# EAGLE board LampBoxV0.31-THT (EAGLE 9.6.2)
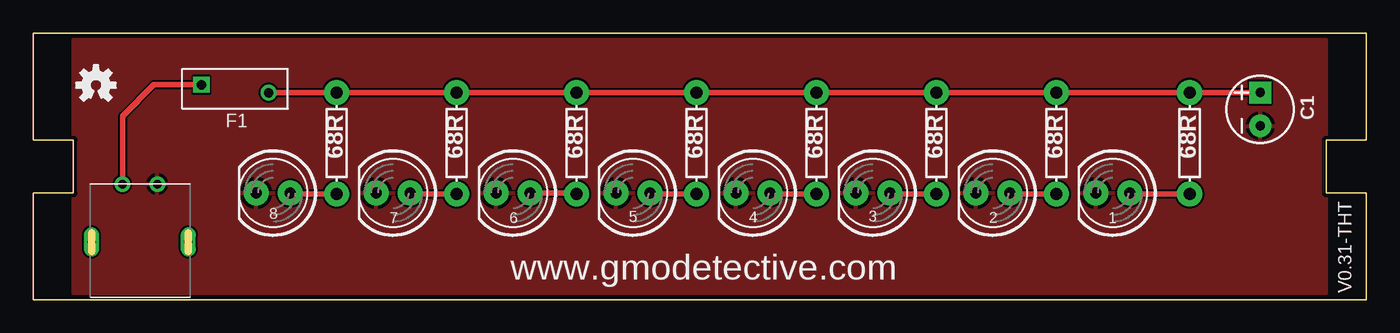
[diagram p0: board, top side]
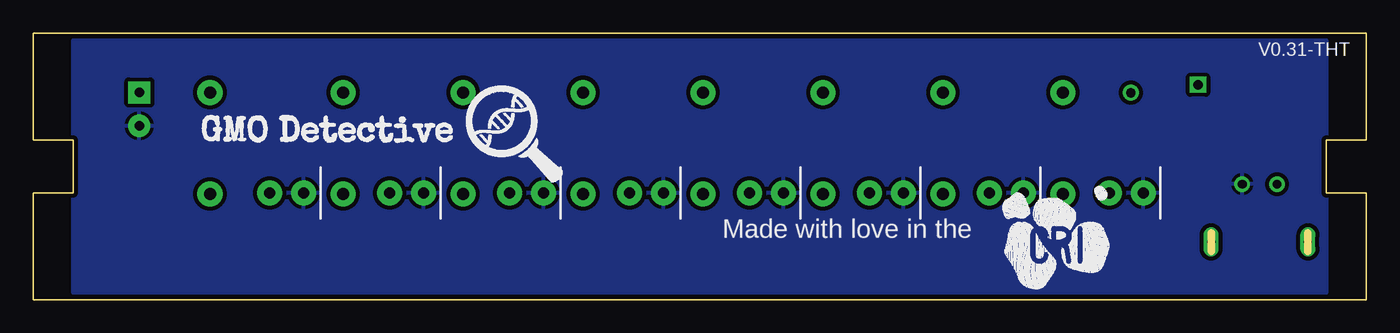
[diagram p1: board, bottom side, seen from below]

Size 100 x 20 mm. Coordinates in mm from the lower left corner, seen from the top.
Outline: 100,0 0,0 0,8 3,8 3,12 0,12 0,20 100,20 100,12 97,12 97,8 100,8 100,0
Copper layers (1*16): Top 0.035mm / dielectric 1.5mm / Bottom 0.035mm
Design rules "PCBWAY_2layer_DRU_no_angle_cheap": minimum track width 0.2mm, minimum drill 0.3mm, track to track 6mil, track to pad 6mil, pad to pad 6mil, via to via 6mil, smd to smd 0mil, copper to edge 10mil, drill to drill 10mil, minimum pad ring 10mil, minimum via ring 6mil, stop-mask expansion 2mil, vias tented up to drill 100mil, thermal gap 10mil
Net classes: 4 pcbway_4mil: width 0.102 mm, drill 0.2 mm, clearance 0.102 mm

## Footprints (pad centres in the part's own frame; a part is rotated, then mirrored left to right if it is on the bottom)
LED_5MM = drill 0.813 pad 1.88: A -1.27,0; K 1.27,0
CPOL-RADIAL-2.5MM-5MM = drill 0.7 pad 1.651 square: 1 1.25,0 | drill 0.7 pad 1.651: 2 -1.25,0
LITTELFUSE_RXEF050_0 = drill 0.7 pad 1.2 square: 1 -2.525,0.3 | drill 0.7 pad 1.2: 2 2.525,-0.3
AXIAL-0.3 = drill 0.9 pad 1.88: P$1 -3.81,0; P$2 3.81,0
MICRO-USB2P-TB1 = drill 0.65: 5V -1.3,2.175; GND 1.3,2.175 | drill 0.6 long: P$1 -3.625,-2.175; P$2 3.625,-2.175

## Placement (x,y rotation side)
1  [LED_5MM]  81,8 180 top
2  [LED_5MM]  72,8 180 top
3  [LED_5MM]  63,8 180 top
4  [LED_5MM]  54,8 180 top
5  [LED_5MM]  45,8 180 top
6  [LED_5MM]  36,8 180 top
7  [LED_5MM]  27,8 180 top
8  [LED_5MM]  18,8 180 top
C1  10UF-POLARGMODETECTOR  [CPOL-RADIAL-2.5MM-5MM]  92.05,14.3 90 top
F1  LITTELFUSE_RXEF050LITTELFUSE_RXEF050_0_0  [LITTELFUSE_RXEF050_0]  15.14,15.84 0 top
LOGO2  OSHW-LOGOS  [OSHW-LOGO-S]  4.7,16.1 0 top
R1  68R  [AXIAL-0.3]  86.75,11.75 270 top
R2  68R  [AXIAL-0.3]  76.75,11.75 270 top
R3  68R  [AXIAL-0.3]  67.75,11.75 270 top
R4  68R  [AXIAL-0.3]  58.75,11.75 270 top
R5  68R  [AXIAL-0.3]  49.75,11.75 270 top
R6  68R  [AXIAL-0.3]  40.75,11.75 270 top
R7  68R  [AXIAL-0.3]  31.75,11.75 270 top
R8  68R  [AXIAL-0.3]  22.75,11.75 270 top
U$2  LOGO_GMO_DETECTIVENEW  [LOGO_GMO_DETECTIVE]  76.5,12.6 0 bottom
U$3  LOGO-CRI-NEW-110MM-BOTTOM-SILK  [LOGO_CRI-NEW-BMP10MM-BOTTOM]  23.1,4.3 0 top
U$4  USB-2P  [MICRO-USB2P-TB1]  8,6.5 0 top

## Library data of the parts
1-8 = movuino; MPN: C503B-BAN-CZ0A0451; OC_MOUSER: 941-C503BBANCZ0A0451
C1 = movuino; MPN: ECA-1JM100B; OC_MOUSER: 667-ECA-1JM100B
F1 = movuino; AMBIENT_TEMPERATURE_RANGE_HIGH: +85°C; AMBIENT_TEMPERATURE_RANGE_LOW: -40°C; AUTOMOTIVE: No; CENTROID_NOT_SPECIFIED: No; CURRENT_RATING: 40A; DATASHEET: https://www.littelfuse.com/~/media/electronics/datasheets/resettable_ptcs/littelfuse_ptc_radial_leaded_rxef_datasheet.pdf.pdf; DEVICE_CLASS_L1: Circuit Protection; DEVICE_CLASS_L2: PTC Resettable Fuses; DEVICE_CLASS_L3: unset; DIGIKEY_DESCRIPTION: PTC RESET FUSE 72V 500MA RADIAL; DIGIKEY_PART_NUMBER: RXEF050HF-ND; FOOTPRINT_VARIANT_NAME_0: Recommended_Land_Pattern; HEIGHT: 13.7mm; HOLD_CURRENT: 0.5A; LEAD_FREE: Yes; MF: Littelfuse; MFG_PACKAGE_IDENT: RXEF050; MFG_PACKAGE_IDENT_DATE: 0; MFG_PACKAGE_IDENT_REV: 0; MOUSER_PART_NUMBER: 650-RXEF050; MPN: RXEF050; PACKAGE: RADIAL; PREFIX: F; RESISTANCE: 0.5-1.17Ω; ROHS: Yes; TEMPERATURE_RANGE_HIGH: +85°C; TEMPERATURE_RANGE_LOW: -40°C; TRIP_CURRENT: 1A; TRIP_TIME: 4s; VERIFICATION_VERSION: 0.0.0.3; VOLTAGE_RATING: 72V
LOGO2 R1-R8 U$4 = movuino
U$2 U$3 = movuino_aestheticsV0

## Nets
+5V: C1.1 F1.2 R1.P$1 R2.P$1 R3.P$1 R4.P$1 R5.P$1 R6.P$1 R7.P$1 R8.P$1
GND: 1.K 2.K 3.K 4.K 5.K 6.K 7.K 8.K C1.2 U$4.GND
N$2: 1.A R1.P$2
N$5: 2.A R2.P$2
N$13: 3.A R3.P$2
N$14: 4.A R4.P$2
N$15: 5.A R5.P$2
N$16: 6.A R6.P$2
N$17: 7.A R7.P$2
N$18: 8.A R8.P$2
VIN: F1.1 U$4.5V

## Tracks (layer width: path | path; a pad name or v marks a point on that pad's centre or on a via)
+5V
  Top 0.406: F1.2 17.68,15.56 R8.P$1 R7.P$1 R6.P$1 R5.P$1 R4.P$1 R3.P$1 R2.P$1 R1.P$1 91.59,15.56 91.6,15.55 C1.1
GND
  pour Top: 3,19.5 3,0.5 97,0.5 97,19.5
  pour Bottom (isolate 0.305): 3,19.5 3,0.5 97,0.5 97,19.5
N$2
  Top 0.406: R1.P$2 82.33,7.94 1.A
N$5
  Top 0.406: R2.P$2 73.33,7.94 2.A
N$13
  Top 0.406: R3.P$2 64.33,7.94 3.A
N$14
  Top 0.406: R4.P$2 55.33,7.94 4.A
N$15
  Top 0.406: R5.P$2 46.33,7.94 5.A
N$16
  Top 0.406: 6.A 40.69,8 R6.P$2
N$17
  Top 0.406: R7.P$2 28.33,7.94 7.A
N$18
  Top 0.406: R8.P$2 19.33,7.94 8.A
VIN
  Top 0.406: U$4.5V 6.7,13.8 9.04,16.14 F1.1

## Text on the board
tPlace: www.gmodetective.com | V0.31-THT
bPlace: V0.31-THT | Made with love in the